# Altium PCB FMC-320U-A1.PcbDoc (part 1 of 2)
Units mm, origin at the board's own origin, x right, y up, seen from the top; angles counter-clockwise.
Board outline 106 x 84 mm, 2 copper layers (Top Layer, Bottom Layer), stack 1.672 mm thick; 77 components, 125 nets, 413 pads, 171 vias.
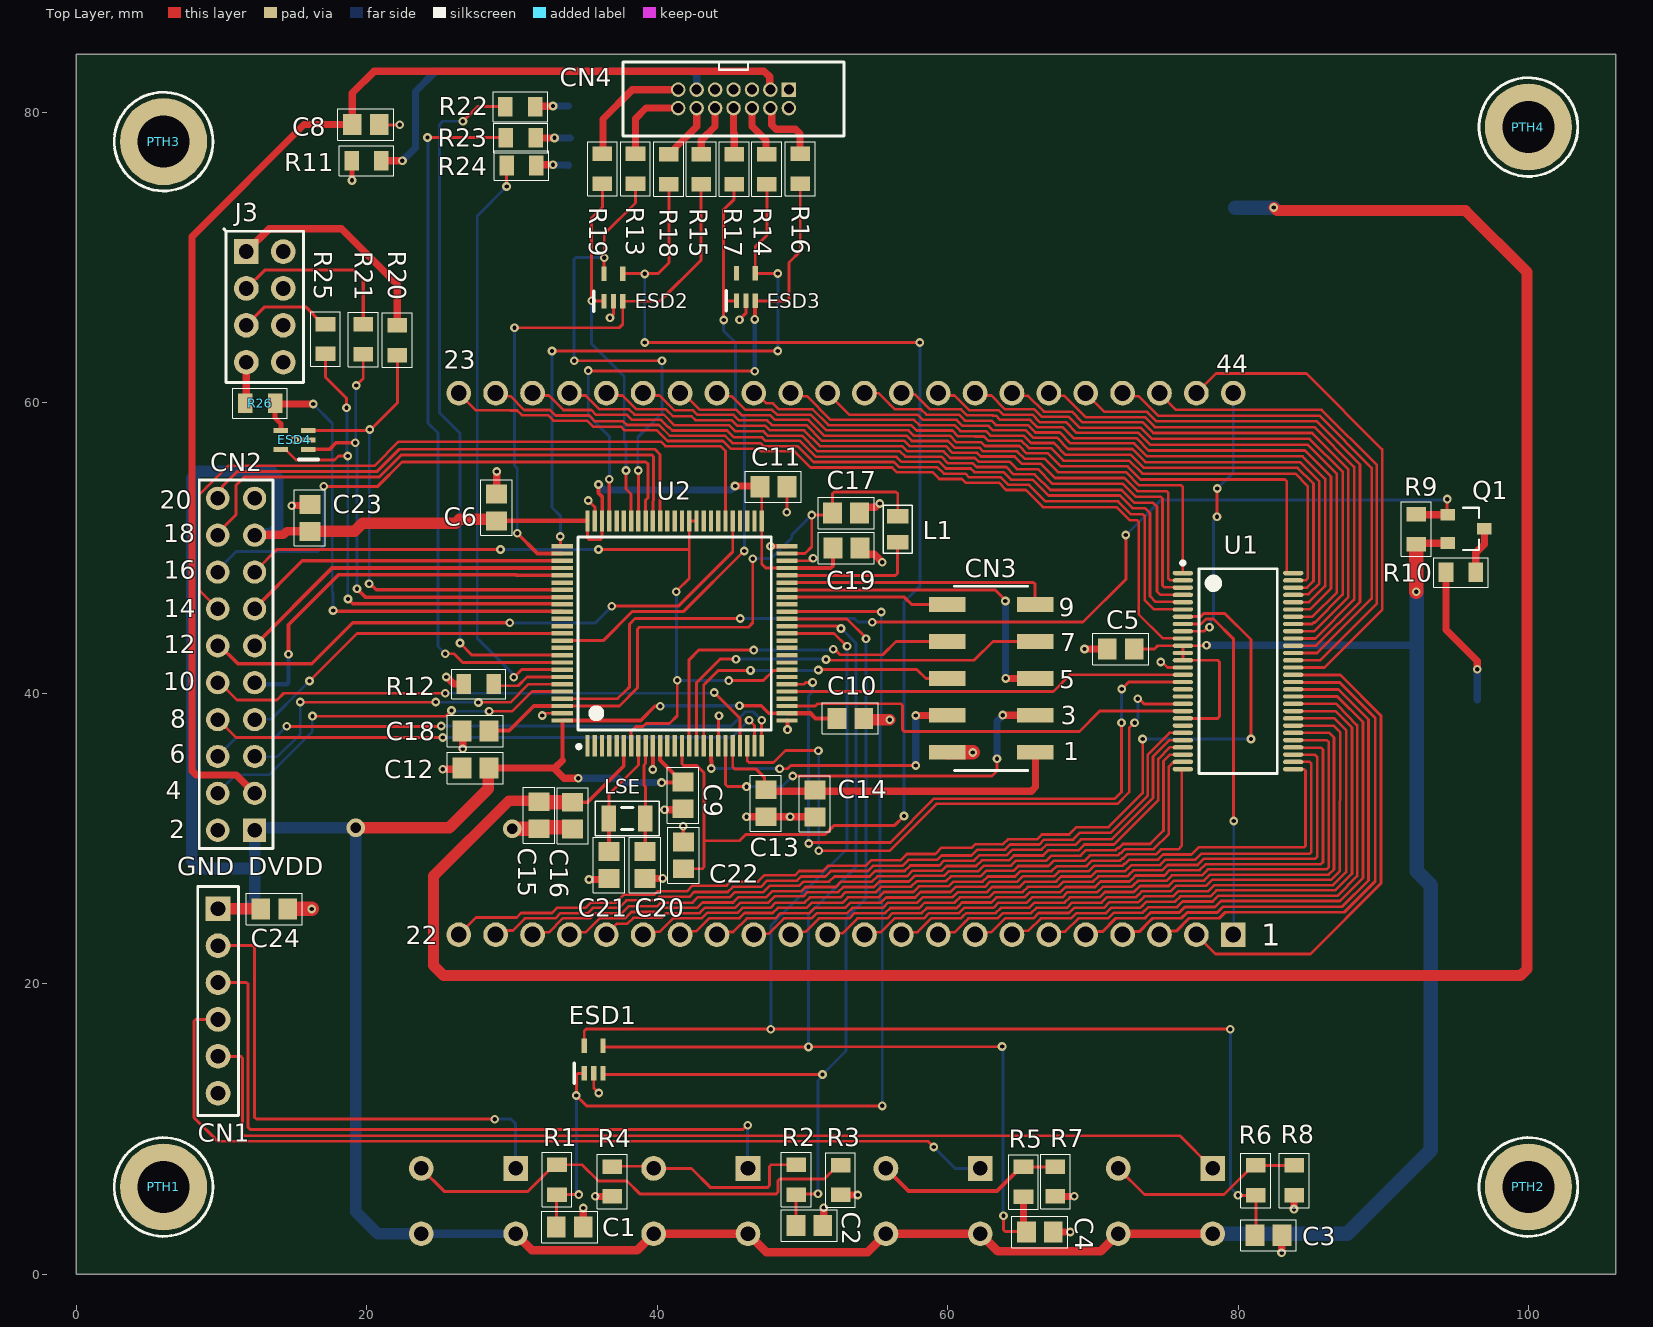
[diagram p0: Top Layer view]
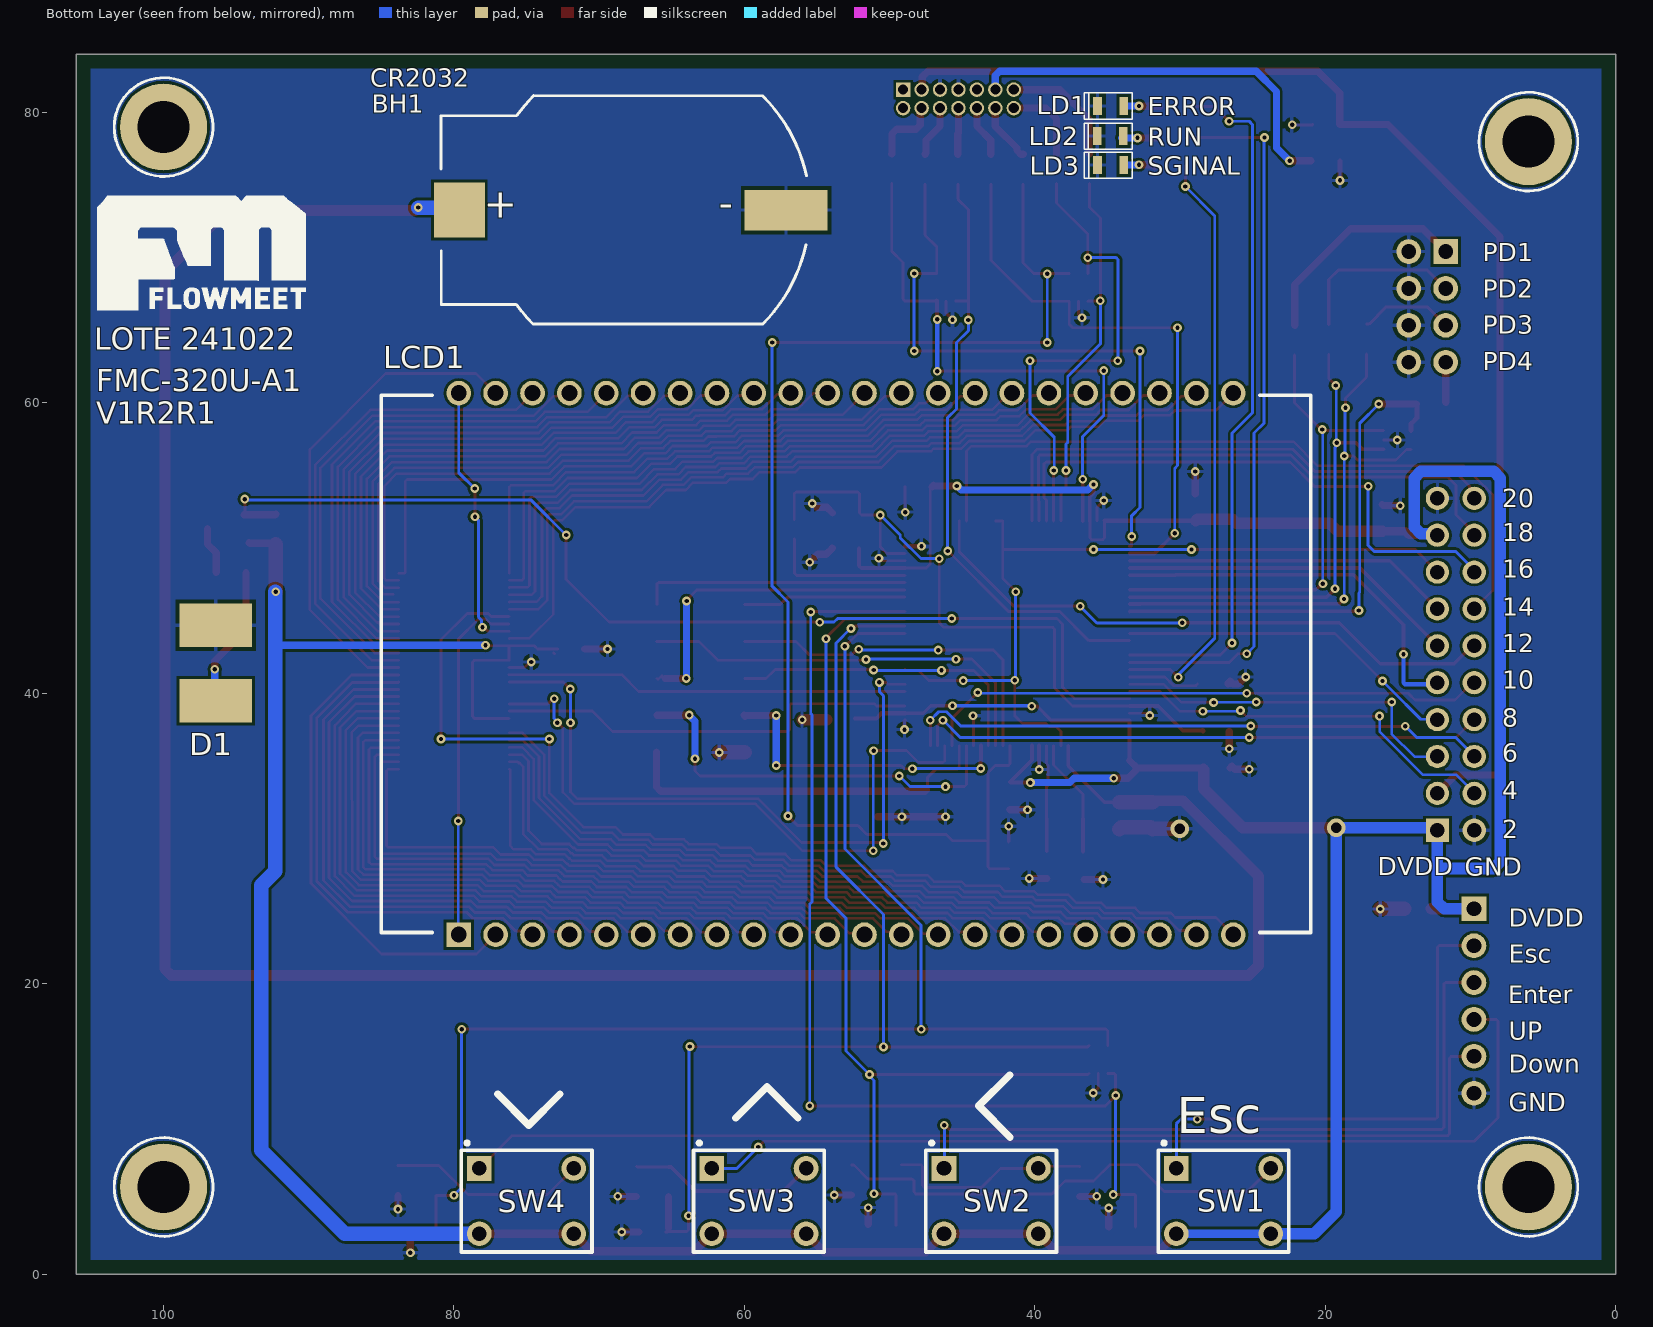
[diagram p1: Bottom Layer view, seen from below]
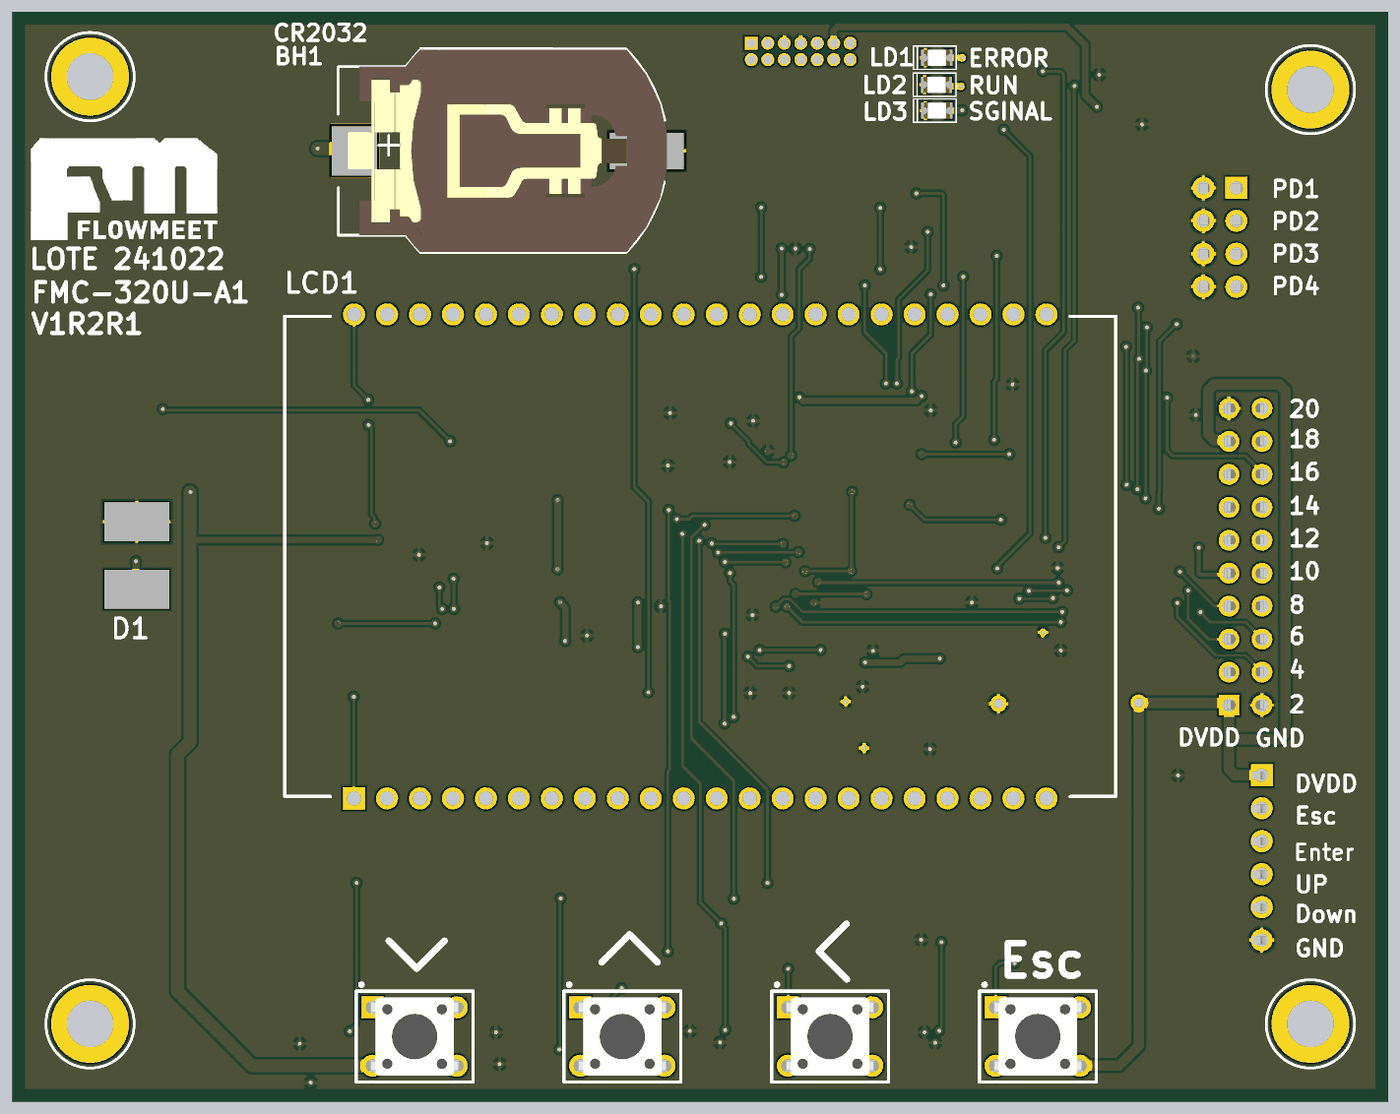
[diagram p3: 3D render of the assembled board from below, using the file's embedded part models]

## Layer stack, top to bottom
Top Solder: solder mask 0.1, Solder Resist, Dk 3.5
Top Layer: signal copper 0.036
Dielectric 1: dielectric 1.6, FR-4, Dk 4.8
Bottom Layer: signal copper 0.036
Bottom Solder: solder mask 0.1, Solder Resist, Dk 3.5

## Board outline
0,0 0,84 106,84 106,0

## Design rules (kind name [scope] priority, off if disabled: settings)
BoardOutlineClearance [All] p1: gap=0.2 ignorepadtopadclearanceinfootprint=FALSE
Clearance [All] p1: gap=0.18 ignorepadtopadclearanceinfootprint=FALSE
ComponentClearance [All] p1: gap=0.099 collisioncheckmode=3 verticalgap=0.099 showdistances=FALSE
HoleSize [All] p1: absolutevalues=TRUE maxlimit=6 minlimit=0.25 maxpercent=80.000 minpercent=20.000
MinimumSolderMaskSliver [All] p1: minsoldermaskwidth=0.051
PolygonConnect [All] p1: connectstyle=Relief reliefconductorwidth=0.254 reliefentries=4 polygonreliefangle="90 Angle" airgapwidth=0.254
RoutingVias [All] p1: holewidth=0.3 width=0.6 viastyle="Through Hole" minholewidth=0.3 minwidth=0.6 maxholewidth=6 maxwidth=10
SilkToSilkClearance [All] p1: silktosilkclearance=0.15
SilkToSolderMaskClearance [IsPad] p1: minsilkscreentomaskgap=0.15 clearancetoexposedcopper=TRUE
SolderMaskExpansion [All] p1: expansion=0.102 istentingtop=FALSE
Width [All] p1: maxlimit=10 minlimit=0.18 preferedwidth=0.2
25 further rules are at their usual default settings.

## Components (designator, comment, footprint, x,y, rotation, side; value= is the part's Value field where it differs from the comment)
BH1 "CR2032" BS-08-B2AA016 66.625,73.278 r0 bottom
C1 "100nF" CAP_SM0805_YAGEOCC2_N 33.975,3.243 r0 top
C2 "100nF" CAP_SM0805_YAGEOCC2_N 50.475,3.353 r0 top
C3 "100nF" CAP_SM0805_YAGEOCC2_N 82.1,2.678 r0 top
C4 "100nF" CAP_SM0805_YAGEOCC2_N 66.35,2.903 r0 top
C5 "100nF" CAP_SM0805_YAGEOCC2_N 71.923,43.053 r180 top
C6 "100nF" CAP_SM0805_YAGEOCC2_N 28.925,52.801 r90 top
C8 "10uF" CAP_SM0805_YAGEOCC2_N 19.925,79.175 r180 top
C9 "100nF" CAP_SM0805_YAGEOCC2_N 41.775,32.978 r270 top
C10 "100nF" CAP_SM0805_YAGEOCC2_N 53.298,38.278 r0 top
C11 "100nF" CAP_SM0805_YAGEOCC2_N 48,54.228 r0 top
C12 "100nF" CAP_SM0805_YAGEOCC2_N 27.475,34.853 r180 top
C13 "100nF" CAP_SM0805_YAGEOCC2_N 47.475,32.43 r270 top
C14 "2.2uF" CAP_SM0805_YAGEOCC2_N 50.85,32.403 r270 top
C15 "100nF" CAP_SM0805_YAGEOCC2_N 31.85,31.602 r270 top
C16 "1uF" CAP_SM0805_YAGEOCC2_N 34.175,31.575 r270 top
C17 "2.2uF" CAP_SM0805_YAGEOCC2_N 53.007,52.424 r0 top
C18 "2.2uF" CAP_SM0805_YAGEOCC2_N 27.475,37.403 r180 top
C19 "10uF" CAP_SM0805_YAGEOCC2_N 53.027,50.003 r0 top
C20 "12pF" CAP_SM0805_YAGEOCC2_N 39.15,28.178 r270 top
C21 "12pF" CAP_SM0805_YAGEOCC2_N 36.675,28.178 r270 top
C22 "100nF" CAP_SM0805_YAGEOCC2_N 41.805,28.844 r90 top
C23 "10uF" CAP_SM0805_YAGEOCC2_N 16.074,52.085 r270 top
C24 "10uF" CAP_SM0805_YAGEOCC2_N 13.623,25.15 r0 top
CN1 "PH2.54-07-06PWD" "HEADER PIN 1X6 A 90 GRADOS" 9.75,18.81 r270 top
CN2 "DW254R-22-20-85" DW254R-22-10-85 11,42 r90 top locked
CN3 "DW254S-22-10-85" "2X5 100 MILS SMD" 63,41.028 r90 top locked
CN4 "20021511-00014T4LF" 2002151100014T4LF 45.255,80.943 r180 top
D1 "BACKLIGHT" BACKLIGHT 55,42.028 r180 bottom locked
ESD1 "ESDALC6V1W5" ESDALC6V1W5 35.625,14.778 r90 top locked
ESD2 "ESDALC6V1W5" ESDALC6V1W5 36.975,67.953 r90 top
ESD3 "ESDALC6V1W5" ESDALC6V1W5 46.1,67.978 r90 top
ESD4 "ESDALC6V1W5" ESDALC6V1W5 15.025,57.45 r180 top
J3 "PH2.54-07-04PWS-JUMPER" "HEADER PIN 2X4 A 90 GRADOS" 12.97,66.615 r270 top
L1 "2.2uH" LQM21PN2R2MGHL 56.562,51.296 r270 top
LCD1 "FM-160LCD-V2R2R1" "FMC-160LCD V2" 53,42.028 r180 bottom locked
LD1 "ERROR" "LED 0805" 34.775,80.453 r0 bottom
LD2 "RUN" "LED 0805" 34.8,78.378 r0 bottom
LD3 "SGINAL" "LED 0805" 34.775,76.378 r0 bottom
LSE "32,768 kHz" SC-32S32.768kHz20PPM12.5pF 37.925,31.378 r180 top
PTH1 "PTH-3MM-M" PTH_M3_M 6,6 r0 top
PTH2 "PTH-3MM-M" PTH_M3_M 100,6 r0 top
PTH3 "PTH-3MM-M" PTH_M3_M 6,78 r0 top
PTH4 "PTH-3MM-M" PTH_M3_M 100,79 r0 top
Q1 "DMG3401LSN-7" DMG3401LSN-7 95.85,51.328 r0 top
R1 "100K" RES_SM0805_YAGEORC_N 33.097,6.501 r270 top
R2 "100K" RES_SM0805_YAGEORC_N 49.575,6.505 r270 top
R3 "100K" RES_SM0805_YAGEORC_N 52.625,6.478 r90 top
R4 "100K" RES_SM0805_YAGEORC_N 36.9,6.378 r90 top
R5 "100K" RES_SM0805_YAGEORC_N 65.225,6.355 r270 top
R6 "100K" RES_SM0805_YAGEORC_N 81.225,6.455 r270 top
R7 "100K" RES_SM0805_YAGEORC_N 67.425,6.38 r90 top
R8 "100K" RES_SM0805_YAGEORC_N 83.875,6.455 r90 top
R9 "1M" RES_SM0805_YAGEORC_N 92.275,51.305 r270 top
R10 "47R" RES_SM0805_YAGEORC_N 95.35,48.328 r0 top
R11 "100R" RES_SM0805_YAGEORC_N 19.973,76.675 r0 top
R12 "10K" RES_SM0805_YAGEORC_N 27.708,40.642 r0 top
R13 "47R" RES_SM0805_YAGEORC_N 38.5,76.128 r270 top
R14 "47R" RES_SM0805_YAGEORC_N 47.55,76.103 r270 top
R15 "47R" RES_SM0805_YAGEORC_N 43.025,76.101 r270 top
R16 "47R" RES_SM0805_YAGEORC_N 49.85,76.128 r270 top
R17 "47R" RES_SM0805_YAGEORC_N 45.3,76.101 r270 top
R18 "47R" RES_SM0805_YAGEORC_N 40.8,76.103 r270 top
R19 "47R" RES_SM0805_YAGEORC_N 36.225,76.128 r270 top
R20 "1K" RES_SM0805_YAGEORC_N 22.1,64.325 r270 top
R21 "1K" RES_SM0805_YAGEORC_N 19.75,64.377 r270 top
R22 "2K2" RES_SM0805_YAGEORC_N 30.573,80.403 r0 top
R23 "2K2" RES_SM0805_YAGEORC_N 30.6,78.252 r0 top
R24 "2K2" RES_SM0805_YAGEORC_N 30.65,76.356 r0 top
R25 "1K" RES_SM0805_YAGEORC_N 17.15,64.402 r270 top
R26 "1K" RES_SM0805_YAGEORC_N 12.648,59.975 r0 top
SW1 "TC-1102-B-A-B" TC-1102-B-A-B 27,5.028 r180 bottom locked
SW2 "TC-1102-B-A-B" TC-1102-B-A-B 43,5.028 r180 bottom locked
SW3 "TC-1102-B-A-B" TC-1102-B-A-B 59,5.028 r180 bottom locked
SW4 "TC-1102-B-A-B" TC-1102-B-A-B 75,5.028 r180 bottom locked
U1 "PCF8553DTT/AY" "LCD DRIVER - TSSOP56" 80,41.528 r0 top locked
U2 "STM32U575VIT6Q" STM32U575VI 41.2,44.128 r90 top locked

## Footprints (in the part's own frame and the unit in brackets; to place one, negate y for a bottom-side part, rotate by r counter-clockwise, add the part's x,y. Pads: shape width x height; smd on the part's side, far side on the other; paste and mask are expansions set on the pad)
"2X5 100 MILS SMD" [mm]
  rect 1.02x2.5 smd: 1(-5.08,-3.025) 2(-5.08,3.025) 3(-2.54,-3.025) 4(-2.54,3.025) 5(0,-3.025) 6(0,3.025) 7(2.54,-3.025) 8(2.54,3.025) 9(5.08,-3.025) 10(5.08,3.025)
  silkscreen extent -6.35,-2.51 6.35,2.51, body extent -6.39,-3.02 6.23,3.02, height 7.2
2002151100014T4LF [mm]
  rect 1x1 hole 0.7: 1(-3.81,-0.635)
  round 1 hole 0.7: 2(-3.81,0.635) 3(-2.54,-0.635) 4(-2.54,0.635) 5(-1.27,-0.635) 6(-1.27,0.635) 7(0,-0.635) 8(0,0.635) 9(1.27,-0.635) 10(1.27,0.635) 11(2.54,-0.635) 12(2.54,0.635) 13(3.81,-0.635) 14(3.81,0.635)
  silkscreen extent -7.59,-2.54 7.62,2.55, body extent -7.57,-2.55 7.62,2.55, height 5.4
BACKLIGHT [mm]
  rect 5x3 smd: 1(-41.402,-2.54) 2(-41.402,2.667)
  body extent -39.37,-16.5 34.5,16.5, height 3
BS-08-B2AA016 [mm]
  rect 5.7x2.8 smd mask+0.2: NEG(-9.5,0)
  rect 3.5x3.8 smd mask+0.2: POS(13,0)
  silkscreen extent -10.9,-7.9 14.28,7.85, body extent -11.14,-7.8 13.5,7.8, height 5.4
CAP_SM0805_YAGEOCC2_N [mm] "Capacitor, Yageo CC Class2, SM0805, IPC Medium Density"
  rect 1.3x1.45 smd: 1(-0.927,0) 2(0.927,0)
  silkscreen extent -1.92,-1.07 1.92,1.07, body extent -1.1,-0.72 1.1,0.72, height 1.45
DMG3401LSN-7 [mm]
  rect 1x0.8 smd: D(1.1,0) G(-1.4,0.975) S(-1.4,-0.975)
  silkscreen extent -0.35,-1.45 0.75,1.45, body extent -1.67,-1.55 1.33,1.55, height 1.45
DW254R-22-10-85 [mm]
  rect 1.6x1.6 hole 1: 1(-11.43,-1.27)
  round 1.6 hole 1: 2(-11.43,1.27) 3(-8.89,-1.27) 4(-8.89,1.27) 5(-6.35,-1.27) 6(-6.35,1.27) 7(-3.81,-1.27) 8(-3.81,1.27) 9(-1.27,-1.27) 10(-1.27,1.27) 11(1.27,-1.27) 12(1.27,1.27) 13(3.81,-1.27) 14(3.81,1.27) 15(6.35,-1.27) 16(6.35,1.27) 17(8.89,-1.27) 18(8.89,1.27) 19(11.43,-1.27) 20(11.43,1.27)
  silkscreen extent -12.7,-2.54 12.7,2.54, body extent -12.7,-2.54 12.7,2.54, height 8.55
ESDALC6V1W5 [mm]
  rect 1x0.35 smd: 1(-0.95,0.65) 2(-0.95,0) 3(-0.95,-0.65) 4(0.95,-0.65) 5(0.95,0.65)
  silkscreen extent -1.63,1.35 -0.28,1.35, body extent -1.07,-1 1.03,1, height 1.1
"FMC-160LCD V2" [mm]
  rect 1.7x1.7 hole 1.1: 1(-26.67,-18.65)
  round 1.7 hole 1.1: 2(-24.13,-18.65) 3(-21.59,-18.65) 4(-19.05,-18.65) 5(-16.51,-18.65) 6(-13.97,-18.65) 7(-11.43,-18.65) 8(-8.89,-18.65) 9(-6.35,-18.65) 10(-3.81,-18.65) 11(-1.27,-18.65) 12(1.27,-18.65) 13(3.81,-18.65) 14(6.35,-18.65) 15(8.89,-18.65) 16(11.43,-18.65) 17(13.97,-18.65) 18(16.51,-18.65) 19(19.05,-18.65) 20(21.59,-18.65) 21(24.13,-18.65) 22(26.67,-18.65) 23(26.67,18.65) 24(24.13,18.65) 25(21.59,18.65) 26(19.05,18.65) 27(16.51,18.65) 28(13.97,18.65) 29(11.43,18.65) 30(8.89,18.65) 31(6.35,18.65) 32(3.81,18.65) 33(1.27,18.65) 34(-1.27,18.65) 35(-3.81,18.65) 36(-6.35,18.65) 37(-8.89,18.65) 38(-11.43,18.65) 39(-13.97,18.65) 40(-16.51,18.65) 41(-19.05,18.65) 42(-21.59,18.65) 43(-24.13,18.65) 44(-26.67,18.65)
  silkscreen extent -32,-18.5 32,18.5, body extent -32,-19.56 32,19.54, height 7
"HEADER PIN 1X6 A 90 GRADOS" [mm]
  rect 1.7x1.7 hole 1.02: 1(-6.35,0)
  round 1.7 hole 1.02: 2(-3.81,0) 3(-1.27,0) 4(1.27,0) 5(3.81,0) 6(6.35,0)
  silkscreen extent -7.87,-1.4 7.87,1.4, body extent -7.39,-8.99 7.44,0.72, height 3.55
"HEADER PIN 2X4 A 90 GRADOS" [mm]
  rect 1.7x1.7 hole 1.02: 1(-3.81,-1.27)
  round 1.7 hole 1.02: 2(-3.81,1.27) 3(-1.27,-1.27) 4(-1.27,1.27) 5(1.27,-1.27) 6(1.27,1.27) 7(3.81,-1.27) 8(3.81,1.27)
  silkscreen extent -5.38,-2.83 5.21,2.67, body extent -4.95,-12.29 4.95,1.55, height 5.54
"LCD DRIVER - TSSOP56" [mm] "TSSOP, 56-Leads, Body 14,00x6,10mm, Pitch 0,50mm, IPC Medium Density"
  oval 1.4x0.3 smd: 1(-3.8,6.75) 2(-3.8,6.25) 3(-3.8,5.75) 4(-3.8,5.25) 5(-3.8,4.75) 6(-3.8,4.25) 7(-3.8,3.75) 8(-3.8,3.25) 9(-3.8,2.75) 10(-3.8,2.25) 11(-3.8,1.75) 12(-3.8,1.25) 13(-3.8,0.75) 14(-3.8,0.25) 15(-3.8,-0.25) 16(-3.8,-0.75) 17(-3.8,-1.25) 18(-3.8,-1.75) 19(-3.8,-2.25) 20(-3.8,-2.75) 21(-3.8,-3.25) 22(-3.8,-3.75) 23(-3.8,-4.25) 24(-3.8,-4.75) 25(-3.8,-5.25) 26(-3.8,-5.75) 27(-3.8,-6.25) 28(-3.8,-6.75) 29(3.8,-6.75) 30(3.8,-6.25) 31(3.8,-5.75) 32(3.8,-5.25) 33(3.8,-4.75) 34(3.8,-4.25) 35(3.8,-3.75) 36(3.8,-3.25) 37(3.8,-2.75) 38(3.8,-2.25) 39(3.8,-1.75) 40(3.8,-1.25) 41(3.8,-0.75) 42(3.8,-0.25) 43(3.8,0.25) 44(3.8,0.75) 45(3.8,1.25) 46(3.8,1.75) 47(3.8,2.25) 48(3.8,2.75) 49(3.8,3.25) 50(3.8,3.75) 51(3.8,4.25) 52(3.8,4.75) 53(3.8,5.25) 54(3.8,5.75) 55(3.8,6.25) 56(3.8,6.75)
  silkscreen extent -3.92,-7.05 2.7,7.57, body extent -4.05,-7.05 4.05,7.05, height 1.2
"LED 0805" [mm]
  rect 0.6x1.25 smd: A(-0.9,0) K(0.9,0)
  silkscreen extent -1.5,-0.9 1.8,0.9, body extent -1,-0.63 1,0.63, height 1
LQM21PN2R2MGHL [mm]
  rect 1x1.5 smd: 1(-0.9,0) 2(0.9,0)
  silkscreen extent -1.65,-1 1.65,1, body extent -1,-0.62 1,0.62, height 1.02
PTH_M3_M [mm]
  round 6 hole 3.6: 1(0,0)
  silkscreen extent -3.4,-3.4 3.4,3.4
RES_SM0805_YAGEORC_N [mm] "Resistor, Yageo RC_L, SM0805, IPC Medium Density"
  rect 1x1.35 smd: 1(-1.027,0) 2(1.027,0)
  silkscreen extent -1.88,-1.02 1.88,1.02, body extent -1.05,-0.67 1.05,0.67, height 0.6
SC-32S32.768kHz20PPM12.5pF [mm]
  rect 1x1.8 smd: 1(-1.25,0) 2(1.25,0)
  silkscreen extent -2.21,-1.19 2.18,1.19, body extent -1.65,-0.84 1.65,0.76, height 0.84
STM32U575VI [mm] "Ultra-low-power with FPU Arm Cortex-M33 MCU with TrustZone, 160 MHz with 2 Mbytes of Flash memory"
  rect 1.475x0.3 smd mask+0.051: 1(-7.738,6) 2(-7.738,5.5) 3(-7.738,5) 4(-7.738,4.5) 5(-7.738,4) 6(-7.738,3.5) 7(-7.738,3) 8(-7.738,2.5) 9(-7.738,2) 10(-7.738,1.5) 11(-7.738,1) 12(-7.738,0.5) 13(-7.738,0) 14(-7.738,-0.5) 15(-7.738,-1) 16(-7.738,-1.5) 17(-7.738,-2) 18(-7.738,-2.5) 19(-7.738,-3) 20(-7.738,-3.5) 21(-7.738,-4) 22(-7.738,-4.5) 23(-7.738,-5) 24(-7.738,-5.5) 25(-7.738,-6) 51(7.738,-6) 52(7.738,-5.5) 53(7.738,-5) 54(7.738,-4.5) 55(7.738,-4) 56(7.738,-3.5) 57(7.738,-3) 58(7.738,-2.5) 59(7.738,-2) 60(7.738,-1.5) 61(7.738,-1) 62(7.738,-0.5) 63(7.738,0) 64(7.738,0.5) 65(7.738,1) 66(7.738,1.5) 67(7.738,2) 68(7.738,2.5) 69(7.738,3) 70(7.738,3.5) 71(7.738,4) 72(7.738,4.5) 73(7.738,5) 74(7.738,5.5) 75(7.738,6)
  rect 0.3x1.475 smd mask+0.051: 26(-6,-7.738) 27(-5.5,-7.738) 28(-5,-7.738) 29(-4.5,-7.738) 30(-4,-7.738) 31(-3.5,-7.738) 32(-3,-7.738) 33(-2.5,-7.738) 34(-2,-7.738) 35(-1.5,-7.738) 36(-1,-7.738) 37(-0.5,-7.738) 38(0,-7.738) 39(0.5,-7.738) 40(1,-7.738) 41(1.5,-7.738) 42(2,-7.738) 43(2.5,-7.738) 44(3,-7.738) 45(3.5,-7.738) 46(4,-7.738) 47(4.5,-7.738) 48(5,-7.738) 49(5.5,-7.738) 50(6,-7.738) 76(6,7.738) 77(5.5,7.738) 78(5,7.738) 79(4.5,7.738) 80(4,7.738) 81(3.5,7.738) 82(3,7.738) 83(2.5,7.738) 84(2,7.738) 85(1.5,7.738) 86(1,7.738) 87(0.5,7.738) 88(0,7.738) 89(-0.5,7.738) 90(-1,7.738) 91(-1.5,7.738) 92(-2,7.738) 93(-2.5,7.738) 94(-3,7.738) 95(-3.5,7.738) 96(-4,7.738) 97(-4.5,7.738) 98(-5,7.738) 99(-5.5,7.738) 100(-6,7.738)
  silkscreen extent -7.9,-6.65 6.65,6.7, body extent -8.1,-8.1 8.1,8.1, height 1.6
TC-1102-B-A-B [mm] "Tactile 6x6mm true hole"
  rect 1.7x1.7 hole 1: 1(-3.25,2.25)
  round 1.7 hole 1: 2(3.25,2.25) 3(-3.25,-2.25) 4(3.25,-2.25)
  silkscreen extent -4.5,-3.5 4.5,4.12, body extent -3.87,-3.02 3.87,3.01, height 5.02

## Part data
BH1: library part BS-08-B2AA016, "Battery base -25℃~+85℃ CR2032 SMD Battery Connectors ROHS", Manufacturer=Myoung, Temperature Max=85, Temperature Min=-25, Category="Battery holder", Datasheet=https://datasheet.lcsc.com/lcsc/2012181809_MYOUNG-BS-08-B2AA016_C964792.pdf, Manufacturer Part Number=BS-08-B2AA016
C1 C2 C3 C4 C5: library part CC0805KRX7R8BB104, "CAP 100nF SM0805 X7R 25V YAGEO CC2", Manufacturer=Yageo, Package=0805, Supplier Part Number 1=644249, Tolerance (%)=10, Voltage Rating (Volts)=25, Category=Capacitor, ComponentLink1Description="Manufacturer Website", ComponentLink1URL=http://www.yageo.com, Datasheet=https://datasheet.lcsc.com/lcsc/2006111832_YAGEO-CC0805KRX7R8BB104_C519981.pdf, Manufacturer Part Number=CC0805KRX7R8BB104, Supplier 1=Farnell, Supplier 2=Digi-Key, Supplier Part Number 2=311-1141-1-ND
C6 C9 C10 C11 C12 C13 C15 C22: library part CC0805KRX7R9BB104, "CAP 100nF SM0805 X7R 50V YAGEO CC2", Manufacturer=Yageo, Package=0805, Supplier Part Number 1=3019949, Tolerance (%)=10, Voltage Rating (Volts)=50, Category=Capacitor, ComponentLink1Description="Manufacturer Website", ComponentLink1URL=http://www.yageo.com, Manufacturer Part Number=CC0805KRX7R9BB104, Supplier 1=Farnell, Supplier 2=Digi-Key, Supplier Part Number 2=311-1140-1-ND
C8 C19 C23 C24: library part CC0805KKX5R8BB106, "CAP 10uF SM0805 X5R 25V YAGEO", Manufacturer=Yageo, Package=0805, Tolerance=10, Category=Capacitor, ComponentLink1Description="Manufacturer Website", ComponentLink1URL=http://www.yageo.com, Datasheet=https://datasheet.lcsc.com/lcsc/2304140030_YAGEO-CC0805KKX5R8BB106_C89831.pdf, Manufacturer Part Number=CC0805KKX5R8BB106
C14 C17 C18: library part CC0805KKX7R8BB225, "CAP 2u2F SM0805 X7R 25V YAGEO CC2", Manufacturer=Yageo, Package=0805, Supplier Part Number 1=1458904, Tolerance (%)=10, Voltage Rating (Volts)=25, Category=Capacitor, ComponentLink1Description="Manufacturer Website", ComponentLink1URL=http://www.yageo.com, Manufacturer Part Number=CC0805KKX7R8BB225, Supplier 1=Farnell, Supplier 2=Digi-Key
C16: library part CC0805KKX7R8BB105, "CAP 1uF SM0805 X7R 25V YAGEO CC2", Manufacturer=Yageo, Package=0805, Supplier Part Number 1=1458903, Tolerance (%)=10, Voltage Rating (Volts)=25, Category=Capacitor, ComponentLink1Description="Manufacturer Website", ComponentLink1URL=http://www.yageo.com, Datasheet=https://datasheet.lcsc.com/lcsc/2304140030_YAGEO-CC0805KKX7R8BB105_C91186.pdf, Manufacturer Part Number=CC0805KKX7R8BB105, Supplier 1=Farnell, Supplier 2=Digi-Key, Supplier Part Number 2=311-1456-1-ND
C20 C21: library part CC0805JRNPO9BN120, "CAP 12pF SM0805 NPO 50V YAGEO CC2", Manufacturer=Yageo, Package=0805, Tolerance (%)=5, Voltage Rating (Volts)=50, Category=Capacitor, ComponentLink1Description="Manufacturer Website", ComponentLink1URL=http://www.yageo.com, Manufacturer Part Number=CC0805JRNPO9BN120
CN1: "1 x 6 - true hole  2.54mm - Pb free - 90°", Manufacturer=XUNPU, Temperature Max=125, Temperature Min=-65, Category="Header pin", Datasheet=https://datasheet.lcsc.com/lcsc/2202082130_Amphenol-ICC-54101-T06-00_C213463.pdf, Manufacturer Part Number=PH2.54-07-06PWD
CN2: "2 x 10 - true hole 2.54mm - altura 8.5mm", Manufacturer=Dealon, Category="Header female", Main supplier=LCSC, Manufacturer Part Number=DW254R-22-20-85, System=Connector
CN3: "2 x 5 - SMD 2.54mm - altura 8.5mm", Manufacturer=Dealon, Category="Header female", Main supplier=LCSC, Manufacturer Part Number=DW254S-22-10-85, System=Connector
CN4: "1.27mm (0.05in.) pitch, Shrouded header, 14 contacts", Manufacturer="Amphenol ICC", Temperature Max=85, Temperature Min=-45, Category="Header Shrouded", Datasheet=https://cdn.amphenol-cs.com/media/wysiwyg/files/drawing/20021511.pdf, Manufacturer Part Number=20021511-00014T4LF
D1: library part FM-160-BACKLIGHT, "IF=45mA;VF=3V", Manufacturer=FLOWMEET, Temperature Max=-, Category=Backlight, Datasheet=-, Manufacturer Part Number=FM-160-BACKLIGHT, Temperature Min=-
ESD1 ESD2 ESD3 ESD4: "TVS Diode Array Uni-Directional 6.1V  / QTY 5 per pack, SOT-323 /  / Ranking 5:  / Marca reconocida. / Usado en placas nucleo, sometidas a manipuleo nunca note un pin quemado por ESD.", Manufacturer=ST, Temperature Max=150, Temperature Min=-40, Category=Diodo, Datasheet=https://www.st.com/content/ccc/resource/technical/document/datasheet/32/30/02/e6/ac/0f/46/c2/CD00002946.pdf/files/CD00002946.pdf/jcr:content/translations/en.CD00002946.pdf, Manufacturer Part Number=ESDALC6V1W5
J3: "2 x 4 - true hole  2.54mm 90°", Manufacturer=XUNPU, Manufacturer Part Number=PH2.54-07-04PWS, Category="Header pin"
L1: library part LQM21PN2R2MGHL, "Inductores de potencia - SMD 2.2 UH 20%", Manufacturer="Murata Electronics", Temperature Max=85, Temperature Min=-40, Category=Inductor, Datasheet=https://ar.mouser.com/datasheet/2/281/1/JELF243B_0040-961444.pdf, Manufacturer Part Number=LQM21PN2R2MGHL
LCD1: Manufacturer=FLOWMEET, Temperature Max=70, Temperature Min=-20, Category=LCD, Datasheet=-, Manufacturer Part Number=FM-160LCD-V2R2R1
LD1: library part 17-21SURC/S530-A2/TR8, Manufacturer="Everlight Elec", Category=LED, Main supplier=LCSC, Manufacturer Part Number=17-21SURC/S530-A2/TR8
LD2: library part 17-21/BHC-XL2M2TY/3T, Manufacturer="Everlight Elec", Manufacturer Part Number=17-21/BHC-XL2M2TY, Temperature Max=85, Temperature Min=-40, Category=LED, Datasheet=https://datasheet.lcsc.com/lcsc/1809192317_Everlight-Elec-17-21-BHC-XL2M2TY-3T_C72035.pdf, Main supplier=LCSC
LD3: library part 17-21SYGC/S530-E2/TR8, Manufacturer="Everlight Elec", Temperature Max=85, Temperature Min=-40, Category=LED, Datasheet=https://mm.digikey.com/Volume0/opasdata/d220001/medias/docus/559/17-21SYGC,S530-E2,TR8.pdf, Main supplier=LCSC, Manufacturer Part Number=17-21SYGC/S530-E2/TR8
LSE: library part SC32S-12.5PF20PPM, "Cristal Oscilador 32.768 kHz, 12.5pF", Manufacturer=Seiko, Temperature Max=85, Temperature Min=-40, Category="Cristal Oscilador", Datasheet=https://datasheet.lcsc.com/lcsc/1811151435_Seiko-SC-32S32-768kHz20PPM12-5pF_C97606.pdf, Manufacturer Part Number=SC32S-12.5PF20PPM
PTH1 PTH2 PTH3 PTH4: "Agujero de montaje metalizado roscas M3. Drill de tamaño medio.", Temperature Max=-, Category="Mounting Hole", Temperature Min=-
Q1: "P-CHANNEL ENHANCEMENT MODE MOSFET / RDS(ON) = 85mΩ @ VGS = -2.5V -> ID -2.7A / V(BR)DDS 30V", Manufacturer="Diodes Incorporated", Temperature Max=150, Temperature Min=-55, Category="Transistor mosfet", Datasheet=https://www.diodes.com/assets/Datasheets/DMG3401LSN.pdf, Manufacturer Part Number=DMG3401LSN-7
R1 R2 R3 R4 R5 R6 R7 R8: library part RC0805FR-07100KL, "RES 100K SM0805 YAGEO RC_L", Manufacturer=Yageo, Package=0805, Power (Watts)=0.125, Resistance (Ohms)=100000, Supplier Part Number 1=9237879, Tolerance (%)=1, Category=Resistor, ComponentLink1Description="Manufacturer Website", ComponentLink1URL=http://www.yageo.com, Datasheet=https://www.yageo.com/upload/media/product/app/datasheet/rchip/pyu-rc_group_51_rohs_l.pdf, Manufacturer Part Number=RC0805FR-07100KL, Supplier 1=Farnell, Supplier 2=Digi-Key, Supplier Part Number 2=311-100KCRCT-ND
R9: library part RC0805FR-071ML, "RES 1M SM0805 YAGEO RC_L", Manufacturer=Yageo, Package=0805, Power (Watts)=0.125, Resistance (Ohms)=1000000, Supplier Part Number 1=9237992, Tolerance (%)=1, Category=Resistor, ComponentLink1Description="Manufacturer Website", ComponentLink1URL=http://www.yageo.com, Datasheet=https://www.yageo.com/upload/media/product/productsearch/datasheet/rchip/PYu-RC_Group_51_RoHS_L_12.pdf, Manufacturer Part Number=RC0805FR-071ML, Supplier 1=Farnell, Supplier 2=Digi-Key, Supplier Part Number 2=311-1.00MCRCT-ND
R10 R13 R14 R15 R16 R17 R18 R19: library part RC0805FR-0747RL, "RES 47R SM0805 YAGEO RC_L", Manufacturer=Yageo, Package=0805, Power (Watts)=0.125, Resistance (Ohms)=47, Supplier Part Number 1=9237321, Tolerance (%)=1, Category=Resistor, ComponentLink1Description="Manufacturer Website", ComponentLink1URL=http://www.yageo.com, Datasheet=https://www.yageo.com/upload/media/product/app/datasheet/rchip/pyu-rc_group_51_rohs_l.pdf, Manufacturer Part Number=RC0805FR-0747RL, Supplier 1=Farnell, Supplier 2=Digi-Key, Supplier Part Number 2=311-47.0CRCT-ND
R11: library part RC0805FR-07100RL, "RES 100R SM0805 YAGEO RC_L", Manufacturer=Yageo, Package=0805, Power (Watts)=0.125, Resistance (Ohms)=100, Supplier Part Number 1=9237364, Tolerance (%)=1, Category=Resistor, ComponentLink1Description="Manufacturer Website", ComponentLink1URL=http://www.yageo.com, Datasheet=https://www.yageo.com/upload/media/product/productsearch/datasheet/rchip/PYu-RC_Group_51_RoHS_L_12.pdf, Manufacturer Part Number=RC0805FR-07100RL, Supplier 1=Farnell, Supplier 2=Digi-Key, Supplier Part Number 2=311-100CRCT-ND
R12: library part RC0805FR-0710KL, "RES 10K SM0805 YAGEO RC_L", Manufacturer=Yageo, Package=0805, Power (Watts)=0.125, Resistance (Ohms)=10000, Supplier Part Number 1=9237755, Tolerance (%)=1, Category=Resistor, ComponentLink1Description="Manufacturer Website", ComponentLink1URL=http://www.yageo.com, Datasheet=https://www.yageo.com/upload/media/product/app/datasheet/rchip/pyu-rc_group_51_rohs_l.pdf, Manufacturer Part Number=RC0805FR-0710KL, Supplier 1=Farnell, Supplier 2=Digi-Key, Supplier Part Number 2=311-10.0KCRCT-ND
R20 R21 R25 R26: library part RC0805FR-071KL, "RES 1K SM0805 YAGEO RC_L", Manufacturer=Yageo, Package=0805, Power (Watts)=0.125, Resistance (Ohms)=1000, Supplier Part Number 1=9237496, Tolerance (%)=1, Category=Resistor, ComponentLink1Description="Manufacturer Website", ComponentLink1URL=http://www.yageo.com, Datasheet=https://www.yageo.com/upload/media/product/app/datasheet/rchip/pyu-rc_group_51_rohs_l.pdf, Manufacturer Part Number=RC0805FR-071KL, Supplier 1=Farnell, Supplier 2=Digi-Key, Supplier Part Number 2=311-1.00KCRCT-ND
R22 R23 R24: library part RC0805FR-072K2L, "RES 2K2 SM0805 YAGEO RC_L", Manufacturer=Yageo, Package=0805, Power (Watts)=0.125, Resistance (Ohms)=2200, Supplier Part Number 1=9237534, Tolerance (%)=1, Category=Resistor, ComponentLink1Description="Manufacturer Website", ComponentLink1URL=http://www.yageo.com, Manufacturer Part Number=RC0805FR-072K2L, Supplier 1=Farnell, Supplier 2=Digi-Key, Supplier Part Number 2=311-2.20KCRCT-ND
SW1 SW2 SW3 SW4: "Switch tactile 6x6mm true hole.", Manufacturer="XKB Connectivity", Temperature Max=85, Temperature Min=-30, Category="Mechanical Switch", Datasheet=https://datasheet.lcsc.com/lcsc/2110111230_XKB-Connectivity-TC-1102-B-A-B_C480281.pdf, Main supplier=LCSC, Manufacturer Part Number=TC-1102-B-A-B
U1: "40 × 4 LCD SEGMENT DRIVER", Manufacturer=NXP, Temperature Max=85, Temperature Min=-40, Category=Driver, Datasheet=https://datasheet.lcsc.com/lcsc/2107141507_NXP-Semicon-PCF8553DTT-AJ_C2653705.pdf, Manufacturer Part Number=PCF8553DTT/AY
U2: library part STM32U575VI_1, Manufacturer=ST, Temperature Max=85, Temperature Min=-40, Category=Microcontrolador, Datasheet=https://www.st.com/resource/en/datasheet/stm32u575ag.pdf, Manufacturer Part Number=STM32U575VIT6Q

## Via types
v1: diameter 0.6, hole 0.3, Top Layer to Bottom Layer, 166 vias
v2: diameter 0.6, hole 0.3, Top Layer to Bottom Layer, tented both sides, 3 vias
v3: diameter 1.27, hole 0.711, Top Layer to Bottom Layer, 2 vias

## Nets (pads, with @x,y where several pads share a name; then routed paths per layer and width w, separated by ;. In a path a pad name is that pad's centre, name@x,y a point inside that pad or via, vN(x,y) a via of type N, cw(c..) or ccw(c..) an arc to the next point about the centre after c; other vN are vias at no path point)
ADC_IN3: CN3.6 U2.17 | length 21.7
  Top Layer w0.2: U2.17@43.2,36.39 43.2,40.578 44.2,41.578 v1@46.325,41.578 ; v1@46.325,41.653 46.4,41.578 v1(46.425,41.578) ; v1(51.1,41.603) 51.125,41.628 57.9,41.628 58.5,41.028 CN3.6@59.975,41.028
  Bottom Layer w0.2: v1(46.425,41.578) 51.075,41.578 v1(51.1,41.603)
ADC_IN4: CN3.4 U2.18 | length 21.5
  Top Layer w0.2: U2.18@43.7,36.39 U2.18@43.705,36.385 ; v1(48.425,34.803) 48.976,34.803 49.201,35.028 v1(57.8,35.028)
  Top Layer w0.28: U2.18@43.7,36.39 43.7,35.369 43.735,35.334 43.735,34.828 v1(43.725,34.818)
  Top Layer w0.5: v1(57.8,38.478) 59.89,38.478 59.94,38.428 CN3.4@60,38.488
  Bottom Layer w0.2: v1(43.725,34.818) 43.732,34.81 48.417,34.81 v1(48.425,34.803)
  Bottom Layer w0.5: v1(57.8,35.028) v1(57.8,38.478)
AVDD: C13.1 C14.1 CN3.1 U2.21 | length 26
  Top Layer w0.2: U2.21@45.2,36.39 45.2,34.928 45.35,34.778 46.812,34.778 47.4,34.189 47.4,33.431 C13.1@47.475,33.357
  Top Layer w0.5: C13.1@47.475,33.357 47.57,33.262 50.825,33.262 51.95,33.262 65.757,33.262 66.05,33.555 CN3.1@66.05,35.948
BATTERY_LEVEL: CN3.7 U2.16 | length 28.9
  Top Layer w0.2: U2.16@42.7,36.39 42.7,40.728 44.325,42.353 v1(45.425,42.353) ; v1(51.625,42.328) 51.675,42.278 61.825,42.278 63.115,43.568 CN3.7@66.05,43.568
  Bottom Layer w0.2: v1(45.425,42.353) 51.6,42.353 v1(51.625,42.328)
COM0: LCD1.22 U1.7 | length 74.7
  Top Layer w0.18: LCD1.22@26.33,23.378 27.516,24.564 30.324,24.564 30.629,24.869 32.737,24.869 33.092,25.224 35.074,25.224 35.429,25.58 37.155,25.58 37.714,26.139 39.795,26.139 40.024,26.367 42.033,26.367 42.414,26.748 44.776,26.748 45.056,27.028 46.935,27.028 47.367,27.46 49.475,27.46 49.78,27.764 51.406,27.764 51.761,28.12 54.352,28.12 54.733,28.501 56.765,28.501 57.197,28.933 59.153,28.933 59.585,29.365 61.667,29.365 61.921,29.619 63.826,29.619 64.157,29.949 66.163,29.949 66.493,30.279 68.373,30.279 68.881,30.787 71.091,30.787 73.428,33.124 v1(73.428,36.858)
  Top Layer w0.2: U1.7@76.2,45.278 77.41,45.278 77.636,45.504 79.089,45.504 80.895,43.698 v1(80.895,36.858)
  Bottom Layer w0.2: v1(73.428,36.858) v1(80.895,36.858)
COM1: LCD1.1 U1.8 | length 24.6
  Top Layer w0.2: U1.8@76.2,44.778 77.447,44.778 77.794,45.124 78.302,45.124 79.7,43.726 v1(79.7,31.203)
  Bottom Layer w0.18: LCD1.1@79.67,23.378 79.7,23.408 v1(79.7,31.203)
COM2: LCD1.44 U1.9 | length 18.8
  Top Layer w0.2: U1.9@76.2,44.278 77.659,44.278 77.926,44.544 v1(78.034,44.544) ; v1(78.55,52.153) 78.55,54.078 v1(78.575,54.103) ; LCD1.44@79.67,60.678 79.67,60.658 LCD1.44@79.7,60.628
  Bottom Layer w0.2: v1(78.034,44.544) 78.11,44.62 78.11,45.035 78.319,45.244 78.319,51.922 v1(78.55,52.153) ; v1(78.575,54.103) 79.67,55.198 LCD1.44@79.67,60.678
COM3: LCD1.23 U1.10 | length 60.6
  Top Layer w0.18: LCD1.23@26.33,60.678 27.519,59.489 29.892,59.489 29.898,59.483 30.354,59.483 30.683,59.154 32.461,59.154 32.842,58.773 35.178,58.773 35.58,58.371 37.497,58.371 37.751,58.117 39.975,58.117 40.712,57.38 44.518,57.38 45.05,56.847 46.981,56.847 47.158,56.67 49.45,56.67 50.568,55.552 56.181,55.552 56.511,55.222 58.975,55.222 59.432,54.765 60.982,54.765 61.236,54.511 63.522,54.511 64.03,54.003 65.397,54.003 66.572,52.828 71.632,52.828 72.532,51.928 73.045,51.928 73.163,51.81 73.163,45.44 74.806,43.797 76.181,43.797 U1.10@76.2,43.778
DVDD: C5.1 C6.1 C9.1 C10.1 C11.1 C12.1 C19.1 C23.2 C24.1 CN1.1 CN2.1 CN2.17 Q1.S R9.2 SW1.3 SW1.4 SW2.3 SW2.4 SW3.3 SW3.4 SW4.3 SW4.4 U1.11 U1.12 U1.13 U1.21 U2.11 U2.27 U2.47 U2.51 U2.73 U2.75 U2.100 | length 348.1
  Top Layer w0.2: U2.75@35.192,51.874 U2.75@35.2,51.866 35.2,50.695 35.317,50.578 36.083,50.578 36.2,50.695 U2.73@36.2,51.866 ; C11.1@47.073,54.228 47.2,54.101 47.2,50.559 47.195,50.554 47.195,48.908 47.475,48.628 U2.47@48.938,48.628 ; C5.1@72.85,43.053 74.25,43.053 74.475,43.278 U1.11@76.2,43.278 ; C5.1@73.075,42.728 C5.1@73.125,42.778 ; U1.21@76.2,38.278 78.608,38.278 78.725,38.395 78.725,42.16 78.608,42.278 U1.13@76.2,42.278 U1.12@76.2,42.778 U1.11@76.2,43.278 ; v1(77.825,43.303) 77.8,43.278 U1.11@76.2,43.278
  Top Layer w0.25: U2.100@33.462,38.128 33.473,38.128 38.858,38.128 39.835,39.104 40.19,39.104 v1(40.204,39.118) ; v1(35.95,54.378) 35.95,53.803 36.2,53.553 U2.73@36.2,51.866 ; v1(45.665,39.138) 47.17,39.138 47.68,38.628 U2.27@48.938,38.628 ; U2.47@48.938,48.628 51.958,48.628 52.105,48.774 C19.1@52.105,49.999
  Top Layer w0.28: U2.11@40.2,36.39 40.2,35.405 41.7,33.905 41.648,33.853 v1(40.3,33.853) ; U2.27@48.938,38.628 50.55,38.628 50.9,38.278 C10.1@52.371,38.278
  Top Layer w0.3: C6.1@28.925,51.874 U2.75@35.192,51.874 ; 33.473,35.376 U2.100@33.473,38.128
  Top Layer w0.5: C12.1@28.402,34.853 32.875,34.853 ; 33.473,35.376 32.95,34.853 32.875,34.853 ; v1(34.55,34.153) 33.575,34.153 32.875,34.853 ; v1(45.361,54.282) 46.927,54.282 46.973,54.328 C11.1@47.073,54.228 ; R9.2@92.325,50.328 94.05,50.328 Q1.S@94.1,50.378
  Top Layer w0.6: CN2.17@12.27,50.918 14.234,50.918 14.474,51.158 C23.2@16.074,51.158 ; 26.11,51.713 26.381,51.984 ; SW1.3@30.25,2.778 31.375,1.653 38.625,1.653 SW2.4@39.75,2.778 SW2.3@46.25,2.778 47.525,1.503 54.475,1.503 SW3.4@55.75,2.778 SW3.3@62.25,2.778 63.45,1.578 70.55,1.578 SW4.4@71.75,2.778 SW4.3@78.25,2.778
  Top Layer w0.8: CN1.1@9.75,25.16 9.755,25.155 12.691,25.155 C24.1@12.696,25.15 ; C23.2@16.074,51.158 19.148,51.158 19.703,51.713 26.11,51.713 ; v3(19.225,30.75) 25.675,30.75 28.354,33.429 28.354,34.729 C12.1@28.385,34.761 ; 26.381,51.984 28.815,51.984 C6.1@28.925,51.874
  Top Layer w1: v1(92.274,46.992) R9.2@92.275,50.278
  Bottom Layer w0.25: v1(40.204,39.118) 40.224,39.138 v1(45.665,39.138)
  Bottom Layer w0.5: v1(34.55,34.153) 37.289,34.153 37.589,33.853 v1(40.3,33.853) ; v1(35.95,54.378) 35.977,54.378 36.345,54.009 45.061,54.009 45.334,54.282 v1(45.361,54.282) ; v1(77.825,43.303) 92.274,43.303 v1(92.274,46.992)
  Bottom Layer w0.6: SW1.4@23.75,2.778 SW1.3@30.25,2.778
  Bottom Layer w0.8: CN1.1@9.75,25.16 11.801,25.16 12.27,25.629 12.27,27.933 ; CN2.1@12.27,30.57 12.45,30.75 v3(19.225,30.75) 19.225,4.3 20.747,2.778 SW1.4@23.75,2.778 ; CN2.1@12.27,30.598 12.27,27.933 ; CN2.17@12.27,50.918 12.334,50.982 13.406,50.982 13.875,51.451 13.875,54.82 13.406,55.288 8.399,55.288 7.931,54.82 7.931,28.401 8.399,27.933 12.27,27.933
  Bottom Layer w1: SW4.3@78.25,2.778 87.525,2.778 93.265,8.518 93.265,26.775 92.3,27.74 v1@92.3,46.993
FLOW_DETECTOR: CN3.10 U2.43 | length 11.3
  Top Layer w0.22: U2.43@48.938,46.628 57.025,46.628 57.545,46.108 CN3.10@60,46.108
GND: BH1.NEG C1.2 C2.2 C3.2 C4.2 C5.2 C6.2 C8.1 C9.2 C10.2 C11.2 C12.2 C13.2 C14.2 C15.2 C16.2 C17.2 C18.2 C19.2 C20.2 C21.2 C22.2 C23.1 C24.2 CN1.6 CN2.2 CN2.19 CN3.2 CN4.5 CN4.7 D1.2 ESD1.2 ESD2.2 ESD3.2 ESD4.2 J3.2 J3.4 J3.6 J3.8 LD1.K LD2.K LD3.K R3.1 R4.1 R7.1 R8.1 R11.1 R12.1 U1.14 U2.10 U2.19 U2.26 U2.48 U2.50 U2.74 U2.99 | length 63.4
  Top Layer w0.2: v1(15.025,57.45) ESD4.2@15.975,57.45 ; R11.1@18.946,76.675 R11.1@18.975,76.646 ; C8.1@20.852,79.175 20.877,79.15 v1(22.275,79.15) ; C18.2@26.548,37.403 C18.2@26.6,37.351 ; C6.2@28.925,53.728 C6.2@28.95,53.753 ; C15.2@31.85,30.675 C15.2@31.877,30.648 ; v1(32.075,38.478) 32.183,38.478 32.333,38.628 U2.99@33.462,38.628 ; C1.2@34.9,3.245 C1.2@34.902,3.243 ; v1(35.25,53.278) 35.7,52.828 U2.74@35.7,51.866 ; ESD1.2@35.625,13.828 35.625,12.828 v1(35.975,12.478) ; C21.2@36.602,27.178 C21.2@36.675,27.251 ; v1(36.75,65.864) 36.975,66.089 ESD2.2@36.975,67.003 ; R4.1@36.898,5.353 R4.1@36.9,5.351 ; C20.2@39.15,27.251 C20.2@39.152,27.253 ; C9.2@41.727,32.003 C9.2@41.775,32.051 ; C22.2@41.8,29.826 41.775,29.801 C22.2@41.805,29.771 ; v1@41.8,30.828 v1(41.8,30.84) ; U2.19@44.2,36.39 44.225,36.415 44.225,38.428 v1(44.25,38.453) ; v1(45.665,65.737) 46.1,66.172 ESD3.2@46.1,67.028 ; U2.50@48.875,50.178 48.925,50.128 U2.50@48.938,50.128 ; v1(48.925,52.478) 48.925,54.226 C11.2@48.927,54.228 ; U2.48@48.938,49.128 50.558,49.128 v1(50.733,49.303) ; C2.2@51.402,3.353 C2.2@51.475,3.426 ; R3.1@52.625,5.451 R3.1@52.627,5.453 ; CN3.2@59.818,35.765 CN3.2@59.95,35.898 ; v1(74.675,42.153) 74.774,42.153 75.149,41.778 U1.14@76.2,41.778 ; R8.1@83.85,5.403 R8.1@83.875,5.428
  Top Layer w0.25: v1(39.696,34.749) v1@39.698,34.751 ; U2.10@39.698,36.388 U2.10@39.7,36.39 ; C22.2@41.8,29.826 v1@41.8,30.828 ; U2.26@48.938,38.128 48.975,38.091 v1(48.975,37.503)
  Top Layer w0.28: v1@39.698,34.751 U2.10@39.698,36.388
  Top Layer w0.3: v1(47.8,50.125) 47.803,50.128 U2.50@48.925,50.128
  Top Layer w0.35: v2(18.975,75.325) R11.1@18.975,76.646
  Top Layer w0.5: v1(14.825,52.925) 14.844,52.944 16.007,52.944 C23.1@16.074,53.012 ; v1(25.225,34.778) 26.223,34.778 26.423,34.978 C12.2@26.548,34.853 ; v1(25.475,41.128) 25.502,41.128 25.987,40.642 26.357,40.642 26.54,40.826 26.681,40.685 R12.1@26.681,40.642 ; v1(26.6,36.178) C18.2@26.6,37.351 ; C6.2@28.95,53.753 v1(28.95,55.278) ; C1.2@34.9,3.245 v1(34.9,4.553) ; v1(35.3,27.178) C21.2@36.602,27.178 ; v1(35.725,5.353) R4.1@36.898,5.353 ; C20.2@39.152,27.253 v1(40.375,27.253) ; v1(40.5,31.978) 41.702,31.978 C9.2@41.727,32.003 ; v1(46.15,31.503) C13.2@47.475,31.503 C13.2@47.475,31.503 v1(49.15,31.504) 50.824,31.504 C14.2@50.825,31.505 ; C2.2@51.475,3.426 v1(51.475,4.578) ; R3.1@52.627,5.453 v1(53.8,5.453) ; C17.2@53.934,52.424 54.318,52.808 55.029,52.808 55.298,53.078 v1(55.325,53.078) ; C19.2@53.954,50.003 53.954,49.97 54.354,49.57 54.957,49.57 v1(55.5,49.028) ; C10.2@54.225,38.278 C10.2@54.325,38.178 ; CN3.2@59.95,35.898 CN3.2@60.1,35.748 ; CN3.2@59.975,35.948 CN3.2@59.985,35.938 ; v1@61.715,35.938 v1(61.725,35.928) ; C4.2@67.277,2.903 v1(68.45,2.903) ; R7.1@67.425,5.353 v1(68.725,5.353) ; v1(69.425,43.053) C5.2@70.996,43.053 ; v1(83,1.478) 83.013,1.491 83.013,2.664 C3.2@83.027,2.678 ; v1(83.85,4.478) R8.1@83.85,5.403
  Top Layer w0.8: C10.2@54.325,38.178 v1(56.023,38.178)
  Top Layer w1: C24.2@14.55,25.15 v1(16.2,25.15) ; v3(30.025,30.675) C15.2@31.85,30.675 ; C15.2@31.877,30.648 32.004,30.775 34.048,30.775 C16.2@34.175,30.648 ; CN3.2@59.985,35.938 v1@61.715,35.938
I2C1_SCL: CN2.5 U2.95 | length 24.6
  Top Layer w0.18: v1(15.414,39.398) v1(24.745,39.398) ; v1(27.682,39.372) 29.892,39.372 31.147,40.628 U2.95@33.462,40.628
  Bottom Layer w0.18: CN2.5@12.27,35.678 12.309,35.638 13.839,35.638 15.414,37.213 v1(15.414,39.398) ; v1(24.745,39.398) 27.657,39.398 v1(27.682,39.372)
I2C1_SDA: CN2.4 U2.96 | length 27.3
  Top Layer w0.18: v1(16.252,38.432) 25.447,38.432 v1(25.828,38.813) ; v1(28.419,38.763) 30.007,38.763 31.372,40.128 U2.96@33.462,40.128
  Bottom Layer w0.18: CN2.4@9.73,33.138 10.986,34.394 13.28,34.394 16.252,37.366 v1(16.252,38.432) ; v1(25.828,38.813) 25.879,38.763 v1(28.419,38.763)
JTDI: ESD2.3 R15.2 U2.77 | length 38.9
  Top Layer w0.2: v1(30.171,65.179) 37.385,65.179 37.625,65.419 ESD2.3@37.625,67.003 40.174,67.003 43.025,69.853 R15.2@43.025,75.074
  Top Layer w0.25: v1(30.36,51.02) 31.752,49.628 U2.77@33.462,49.628
  Bottom Layer w0.2: v1(30.171,65.179) 30.171,55.681 30.36,55.493 v1(30.36,51.02)
KEY_DOWN: C3.1 ESD1.5 R6.2 U2.38 | length 94.3
  Top Layer w0.2: ESD1.5@34.975,15.728 34.975,16.751 35.092,16.868 v1(47.824,16.868) v1(79.473,16.868) ; U2.38@48.938,44.128 52.175,44.128 53.065,43.238 v1(53.075,43.238) ; v1(80,5.428) 81.125,5.428 81.175,5.378 R6.2@81.225,5.428 ; C3.1@81.173,2.678 81.225,2.73 R6.2@81.225,5.378
  Bottom Layer w0.2: v1(47.824,16.868) 47.824,24.031 53.075,29.281 v1(53.075,43.238) ; v1(79.473,16.868) 79.473,5.955 v1(80,5.428)
KEY_ENTER: C2.1 ESD1.3 R2.2 U2.40 | length 64.4
  Top Layer w0.2: ESD1.3@36.275,13.828 36.275,13.819 36.35,13.744 v1(51.38,13.744) ; U2.40@48.938,45.128 53.078,45.128 54.375,43.83 v1(54.375,43.753) ; C2.1@49.548,3.353 49.548,5.451 R2.2@49.575,5.478 49.625,5.528 v1(51.075,5.528)
  Bottom Layer w0.2: v1(51.075,5.528) 51.075,13.33 51.38,13.635 v1(51.38,13.744) 53,15.363 53,24.507 54.375,25.882 v1(54.375,43.753)
KEY_ESC: C1.1 ESD1.1 R1.2 U2.41 | length 74.6
  Top Layer w0.2: C1.1@33.048,3.243 33.048,5.425 33.1,5.478 v1(34.6,5.478) ; ESD1.1@34.975,13.828 34.542,13.828 34.425,13.71 v1(34.425,12.303) 35.143,11.585 v1(55.495,11.585) ; U2.41@48.938,45.628 55.4,45.628 v1(55.425,45.603)
  Bottom Layer w0.2: v1(34.425,12.303) 34.425,5.761 34.6,5.586 v1(34.6,5.478) ; v1(55.425,45.603) 55.425,38.6 55.343,38.518 55.343,25.637 55.495,25.485 v1(55.495,11.585)
KEY_UP: C4.1 ESD1.4 R5.2 U2.39 | length 78.4
  Top Layer w0.2: ESD1.4@36.275,15.728 36.275,15.724 36.35,15.649 v1(50.415,15.649) 50.428,15.661 63.738,15.661 v1(63.75,15.674) ; U2.39@48.938,44.628 52.387,44.628 52.552,44.463 v1(52.66,44.463) ; v1(63.85,4.028) 63.85,3.045 63.967,2.928 65.225,2.928 65.25,2.903 C4.1@65.423,2.903
  Top Layer w0.5: C4.1@65.225,3.176 R5.2@65.225,5.328
  Bottom Layer w0.2: v1(50.415,15.649) 50.415,24.767 53.675,28.027 53.675,43.476 52.688,44.463 v1(52.66,44.463) ; v1(63.75,15.674) 63.8,15.624 63.8,4.078 v1(63.85,4.028)
LCD_BACKLIGTH: Q1.G R9.1 U2.97 | length 74.5
  Top Layer w0.18: U2.97@33.462,39.628 37.275,39.628 37.775,40.128
  Top Layer w0.2: 37.775,40.128 38.1,40.453 38.1,44.778 38.475,45.153 v1(45.725,45.153) ; v1(54.8,44.903) 69.325,44.903 72.275,47.853 v1(72.275,50.903) ; Q1.G@94.15,52.228 Q1.G@94.225,52.303 ; v1(94.4,53.378) 94.4,52.353 Q1.G@94.45,52.303
  Top Layer w0.5: R9.1@92.275,52.332 92.304,52.303 94.225,52.303 Q1.G@94.45,52.303
  Bottom Layer w0.2: v1(45.725,45.153) 53.575,45.153 53.825,44.903 v1(54.8,44.903) ; v1(72.275,50.903) 74.675,53.303 94.325,53.303 v1(94.4,53.378)
LED_ACTIVE: R23.1 U2.92 | length 49.8
  Top Layer w0.2: v1(24.177,78.285) 29.54,78.285 R23.1@29.573,78.252 ; v1(25.4,42.728) 26.003,42.728 26.603,42.128 U2.92@33.462,42.128
  Bottom Layer w0.2: v1(24.177,78.285) 24.2,78.262 24.2,58.628 24.9,57.928 24.9,43.228 v1(25.4,42.728)
LED_ERROR: R22.1 U2.91 | length 48.7
  Top Layer w0.2: v1(26.412,43.462) 27.246,42.628 U2.91@33.462,42.628 ; v1(26.615,79.403) 27.615,80.403 R22.1@29.546,80.403
  Bottom Layer w0.2: v1(26.412,43.462) 26.412,57.914 25.015,59.311 25.015,79.184 25.234,79.403 v1(26.615,79.403)
LED_SIGNAL: R24.1 U2.93 | length 40.7
  Top Layer w0.2: R24.1@29.623,76.356 R24.1@29.623,76.356 v1(29.625,74.903) ; v1(30.121,41.099) 30.649,41.628 U2.93@33.462,41.628
  Bottom Layer w0.2: v1(29.625,74.903) 27.605,72.883 27.605,43.793 30.121,41.277 v1(30.121,41.099)
MXC_CONNECT: CN2.18 U2.66 | length 38
  Top Layer w0.2: CN2.18@9.73,51.043 10.975,52.288 10.975,54.313 11.553,54.892 20.854,54.892 22.39,56.428 39.633,56.428 39.75,56.31 39.75,53.287 39.7,53.237 U2.66@39.7,51.866
MXC_ON: CN2.20 U2.65 | length 36.7
  Top Layer w0.2: CN2.20@9.73,53.583 9.73,53.836 10.071,54.177 10.071,54.273 11.086,55.288 20.713,55.288 22.232,56.808 39.84,56.808 40.2,56.448 U2.65@40.2,51.866
NetC20_1: C20.1 LSE.1 U2.9 | length 7.4
  Top Layer w0.2: C20.1@39.15,29.105 C20.1@39.175,29.13 ; LSE.1@39.175,31.378 39.2,31.403 39.2,33.566 39.091,33.675 39.091,35.063 39.2,35.172 U2.9@39.2,36.39
  Top Layer w0.25: C20.1@39.175,29.13 LSE.1@39.175,31.378
NetC21_1: C21.1 LSE.2 U2.8 | length 8.1
  Top Layer w0.2: LSE.2@36.675,31.378 36.675,33.049 38.7,35.074 U2.8@38.7,36.39
  Top Layer w0.25: C21.1@36.675,29.105 LSE.2@36.675,31.378
NetCN4_11: CN4.11 R11.2 | length 27.6
  Top Layer w0.5: R11.2@21,76.675 v2(22.45,76.675)
  Bottom Layer w0.5: v2(22.45,76.675) 23.347,77.572 23.347,81.447 24.75,82.85 42.422,82.85 42.715,82.557 CN4.11@42.715,81.578
NetD1_1: D1.1 R10.1 | length 9.8
  Top Layer w0.5: R10.1@94.323,48.328 94.323,44.38 96.475,42.228 v1(96.475,41.653)
  Bottom Layer w0.2: D1.1@96.402,39.488 D1.1@96.475,39.561
  Bottom Layer w0.5: D1.1@96.475,39.561 v1(96.475,41.653)
NetL1_2: L1.2 U2.46 | length 10
  Top Layer w0.2: U2.46@48.938,48.128 56.419,48.128 56.537,48.245 56.537,50.595 L1.2@56.562,50.621
NetLD1_A: LD1.A R22.2 | length 2.5
  Top Layer w0.5: R22.2@31.377,80.428 31.389,80.44 32.812,80.44 v1(32.825,80.453)
  Bottom Layer w0.5: v1(32.825,80.453) LD1.A@33.875,80.453
NetLD2_A: LD2.A R23.2 | length 2.4
  Top Layer w0.5: R23.2@31.627,78.252 v1@32.925,78.252
  Bottom Layer w0.5: v1(32.925,78.253) LD2.A@34.025,78.253
NetLD3_A: LD3.A R24.2 | length 2.3
  Top Layer w0.5: R24.2@31.747,76.269 31.747,76.316 31.883,76.453 31.933,76.403 v1(32.825,76.403)
  Bottom Layer w0.5: v1(32.825,76.403) 32.838,76.39 33.863,76.39 LD3.A@33.875,76.378
NetQ1_D: Q1.D R10.2 | length 3.3
  Top Layer w0.5: R10.2@96.377,48.328 96.377,49.678 96.975,50.276 Q1.D@96.975,51.359
NetR1_1: R1.1 R3.2 SW1.2 | length 32.4
  Top Layer w0.2: SW1.2@23.75,7.278 25.325,5.703 31.096,5.703 32.922,7.528 R1.1@33.097,7.528 34.824,7.528 35.95,6.403 37.925,6.403 38.8,5.528 48.208,5.528 48.325,5.645 48.325,6.435 48.442,6.553 51.498,6.553 52.45,7.505 R3.2@52.625,7.505
NetR2_1: R2.1 R4.2 SW2.2 | length 14.1
  Top Layer w0.2: R4.2@36.9,7.405 36.923,7.428 SW2.2@39.6,7.428 ; SW2.2@39.75,7.278 42.35,7.278 43.65,5.978 47.608,5.978 47.725,6.095 47.725,7.411 47.842,7.528 R2.1@49.17,7.528
NetR5_1: R5.1 R7.2 SW3.2 | length 13
  Top Layer w0.2: R5.1@65.225,7.382 67.4,7.382 R7.2@67.425,7.407
  Top Layer w0.3: SW3.2@55.75,7.278 57.3,5.728 63.396,5.728 65.05,7.382 R5.1@65.225,7.382
NetR6_1: R6.1 R8.2 SW4.2 | length 13.7
  Top Layer w0.2: SW4.2@71.75,7.278 73.553,5.474 79.043,5.474 81.05,7.482 R6.1@81.225,7.482 R8.2@83.875,7.482
NetR12_2: R12.2 U2.94 | length 5
  Top Layer w0.2: R12.2@28.785,40.642 28.908,40.519 30.43,40.519 31.038,41.128 U2.94@33.462,41.128
NRST: C22.1 ESD2.4 R18.2 U2.14 | length 91.1
  Top Layer w0.2: ESD2.4@37.625,68.903 40.042,68.903 40.8,69.66 R18.2@40.8,75.076 ; v1(39.138,64.163) v1(58.086,64.163) ; U2.14@41.7,36.39 41.7,35.133 41.817,35.015 42.733,35.015 43.225,34.523 43.225,29.847 ; C22.1@41.805,27.917 43.108,27.917 43.225,28.034 43.225,29.847 ; v1(56.994,31.549) 56.352,30.907 52.196,30.907 51.567,30.279 46.09,30.279 45.658,29.847 43.225,29.847
  Bottom Layer w0.2: v1(39.138,64.163) v1(39.138,68.887) ; v1(56.994,31.549) 56.994,46.284 58.086,47.377 v1(58.086,64.163)